# Altium PCB 330 下灯位.PcbDoc (part 4 of 5)
Units mm, origin at the board's own origin, x right, y up, seen from the top; angles counter-clockwise.
Board outline 301.8 x 92.3 mm, 2 copper layers (Top, Bottom), stack 0.323 mm thick; 298 components, 203 nets, 2190 pads, 758 vias.
Unrouted connection lines stored in the file: 36.
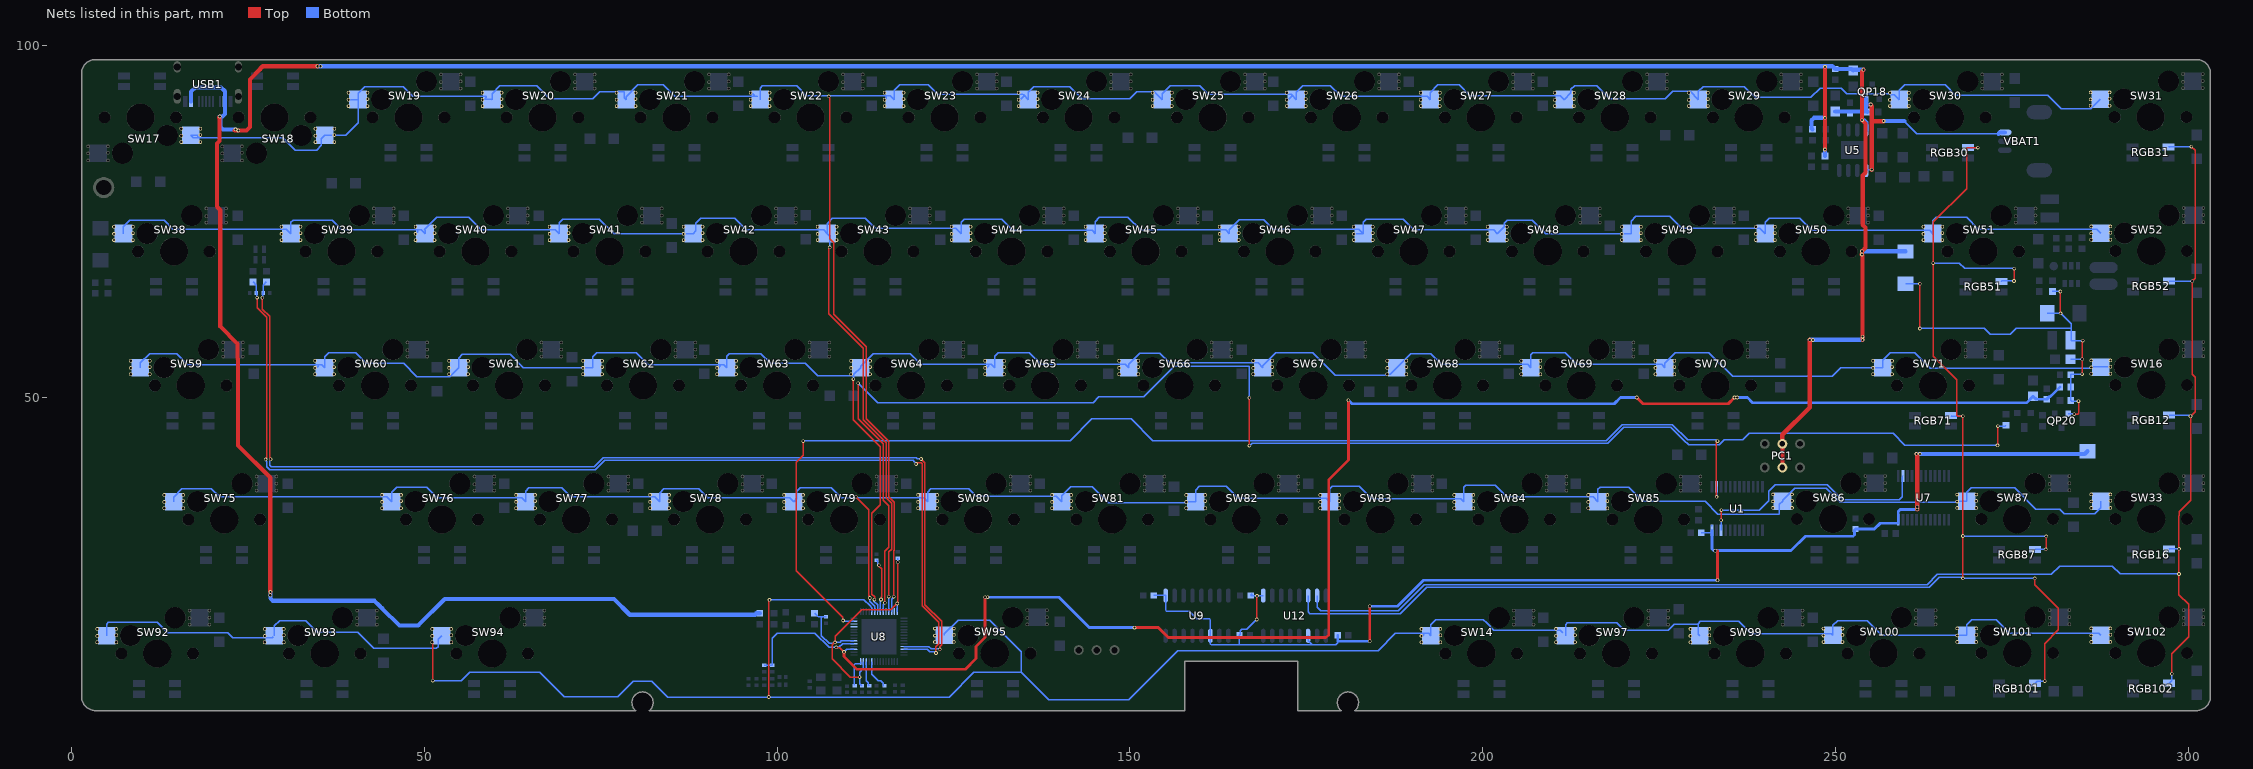
[diagram p4: the nets of this part, all layers, seen from the top]

## Via types
v1: diameter 0.508, hole 0.305, Top to Bottom, tented both sides, 758 vias

## Nets (pads, with @x,y where several pads share a name; then routed paths per layer and width w, separated by ;. In a path a pad name is that pad's centre, name@x,y a point inside that pad or via, vN(x,y) a via of type N, cw(c..) or ccw(c..) an arc to the next point about the centre after c; other vN are vias at no path point) (continued)
LED13: RGB30.4 RGB51.4 RGB71.4 RGB87.4 RGB101.4 U12.6 | length 226.6
  Top w0.2: v1(268.091,24.395) 268.091,30.394 v1@268.091,47.371 ; v1(268.097,47.371) 267.362,47.371 267.245,47.488 267.245,52.541 263.906,55.88 263.906,69.092 263.906,74.93 268.605,79.629 268.605,85.354 268.722,85.471 270.201,85.471 v1(270.207,85.464) ; v1(275.336,66.548) 275.376,66.588 v1(275.376,68.297) ; v1(278.279,24.395) 278.279,23.473 281.619,20.133 281.619,17.078 279.699,15.158 v1(279.699,9.821) ; v1(279.825,28.491) 279.884,28.55 279.884,28.739 279.908,28.763 v1(279.908,30.353)
  Bottom w0.2: U12.6@175.26,21.956 175.26,19.656 175.504,19.412 188.354,19.412 192.065,23.123 263.333,23.123 264.76,24.549 268.091,24.549 v1@268.12,24.52 ; v1(263.887,69.092) 267.601,69.092 268.367,68.326 275.347,68.326 v1(275.376,68.297) ; RGB71.4@266.412,47.464 266.505,47.371 v1(268.097,47.371) ; v1(268.08,30.394) 279.867,30.394 v1(279.908,30.353) ; v1(268.091,24.395) 268.12,24.424 v1@268.12,24.52 ; RGB30.4@268.782,85.464 v1(270.207,85.464) ; RGB51.4@273.532,66.464 273.616,66.548 v1(275.336,66.548) ; v1(278.279,24.395) 268.233,24.395 268.12,24.508 v1@268.12,24.52 ; RGB101.4@278.325,9.525 278.621,9.821 v1(279.699,9.821) ; RGB87.4@278.325,28.509 278.342,28.491 v1(279.825,28.491)
LED14: RGB12.4 RGB16.4 RGB31.4 RGB52.4 RGB102.4 U12.7 | length 217.5
  Top w0.2: v1(297.71,10.865) 297.71,13.738 300.101,16.129 300.101,20.701 298.716,22.086 298.716,33.271 298.75,33.305 298.75,33.863 300.355,35.468 v1(300.355,47.371) 301.015,48.031 301.015,51.317 301.016,51.318 301.016,52.271 301.015,52.273 301.015,52.915 300.609,53.321 v1(300.609,66.506) 301.016,66.913 301.016,85.064 v1(300.482,85.598)
  Bottom w0.2: U12.7@176.53,21.956 176.53,20.32 177.038,19.812 188.033,19.812 191.744,23.523 263.017,23.523 264.443,24.949 280.6,24.949 281.787,26.136 289.251,26.136 290.369,25.018 v1(298.721,25.018) ; RGB31.4@297.242,85.514 297.326,85.598 v1(300.482,85.598) ; RGB102.4@297.336,9.525 297.71,9.899 v1(297.71,10.865) ; RGB16.4@297.336,28.525 297.388,28.577 v1(298.737,28.577) ; RGB12.4@297.336,47.525 300.118,47.525 300.272,47.371 v1(300.355,47.371) ; RGB52.4@297.336,66.525 300.59,66.525 v1(300.609,66.506)
LED_PWR: R33.1 U8.51 | length 218
  Top w0.2: v1(111.47,52.055) 111.47,47.038 112.068,46.441 112.068,46.428 115.037,43.459 115.037,35.458 115.824,34.671 115.824,28.804 115.273,28.253 v1(115.273,20.947) ; v1(166.947,43.216) v1(166.947,49.997) ; v1(272.995,43.245) 273.022,43.273 273.022,45.946 v1(273.05,45.974)
  Bottom w0.2: v1(111.47,52.055) 114.25,49.276 144.774,49.276 145.62,50.122 151.969,50.122 156.31,54.463 164.96,54.463 164.98,54.483 166.82,54.483 166.937,54.366 166.937,50.007 v1(166.947,49.997) ; U8.51@115.027,19.679 115.027,20.666 115.273,20.912 v1(115.273,20.947) ; v1(166.947,43.216) 167.006,43.216 167.315,43.525 217.769,43.525 220.045,45.801 226.701,45.801 228.503,44 228.521,44 229.217,43.304 233.528,43.304 234.236,44.012 236.91,44.012 237.837,44.938 258.185,44.938 259.833,43.291 272.95,43.291 v1(272.995,43.245) ; v1(273.05,45.974) 274.074,45.974 R33.1@274.193,46.093
PMCU_5V0: C4.2 C13.2 C32.1 R1.1 U8.31 U8.33 Z3.2 | length 239.8
  Top w0.2: v1(108.377,14.606) 108.436,14.547 108.897,14.547 v1(109.474,13.97)
  Top w0.4: v1(109.474,13.97) 109.474,13.335 111.312,11.497 126.669,11.497 128.194,13.022 128.194,14.72 129.471,15.997 v1(129.471,21.724) ; v1@150.653,17.433 154.017,17.433 155.448,16.002 177.8,16.002 178.181,16.383 178.181,38.354 180.979,41.152 v1(180.979,49.643) ; v1(221.86,50.027) 222.737,49.151 234.825,49.151 v1(235.712,50.038)
  Bottom w0.2: Z3.2@98.171,12.061 C13.2@99.304,12.061 99.304,15.873 100.032,16.601 105.363,16.601 107.359,14.606 v1(108.377,14.606) 108.761,14.606 109.284,15.129 U8.33@110.877,15.129 ; v1(109.474,13.97) 109.512,13.97 109.871,14.329 U8.31@110.877,14.329
  Bottom w0.4: v1(129.471,21.724) 139.947,21.724 144.251,17.42 v1(150.653,17.42) ; v1(180.979,49.643) 181.473,49.149 218.673,49.149 219.551,50.027 v1(221.86,50.027) ; v1(236.093,50.038) 237.531,50.038 238.293,49.276 277.106,49.276 C32.1@278.048,50.218 278.477,49.789 C4.2@279.98,49.789 280.33,50.139 280.45,50.139 280.857,50.546 R1.1@281.837,51.525
  other v1: 129.835,21.727
R0: U8.55
R1: SW17.2 SW17.12 SW17.13 SW17.18 SW17.19 SW17.20 SW17.21 SW18.2 SW18.12 SW18.13 SW18.18 SW18.19 SW18.20 SW18.21 SW19.2 SW19.12 SW19.13 SW19.18 SW19.19 SW19.20 SW19.21 SW20.2 SW20.12 SW20.13 SW20.18 SW20.19 SW20.20 SW20.21 SW21.2 SW21.12 SW21.13 SW21.18 SW21.19 SW21.20 SW21.21 SW22.2 SW22.12 SW22.13 SW22.18 SW22.19 SW22.20 SW22.21 SW23.2 SW23.12 SW23.13 SW23.18 SW23.19 SW23.20 SW23.21 SW24.2 SW24.12 SW24.13 SW24.18 SW24.19 SW24.20 SW24.21 SW25.2 SW25.12 SW25.13 SW25.18 SW25.19 SW25.20 SW25.21 SW26.2 SW26.12 SW26.13 SW26.18 SW26.19 SW26.20 SW26.21 SW27.2 SW27.12 SW27.13 SW27.18 SW27.19 SW27.20 SW27.21 SW28.2 SW28.12 SW28.13 SW28.18 SW28.19 SW28.20 SW28.21 SW29.2 SW29.12 SW29.13 SW29.18 SW29.19 SW29.20 SW29.21 SW30.2 SW30.12 SW30.13 SW30.18 SW30.19 SW30.20 SW30.21 SW31.2 SW31.12 SW31.13 SW31.18 SW31.19 SW31.20 SW31.21 U8.54 | length 393.2
  Top w0.2: v1(107.315,92.71) 107.315,92.627 107.444,92.498 107.444,72.545 108.016,71.973 108.016,71.075 108.002,71.062 108.002,61.827 112.622,57.208 112.622,47.019 115.837,43.803 115.837,35.998 116.624,35.211 116.624,28.371 116.535,28.282 v1(116.535,21.798)
  Bottom w0.2: SW17.2@18.032,87.194 SW17.2@16.882,87.194 17.208,86.868 SW17.2@17.866,86.868 ; SW17.20@18.232,87.234 18.032,87.234 17.866,87.068 SW17.2@17.866,86.868 ; SW19.20@39.232,92.234 39.272,92.274 SW19.2@40.582,92.274 ; SW20.20@58.232,92.234 SW20.20@58.301,92.304 ; SW20.2@58.332,92.329 SW20.2@58.432,92.329 ; SW20.2@58.432,92.234 SW20.2@58.527,92.329 ; SW22.20@96.232,92.234 SW22.2@96.432,92.234 ; SW22.21@96.232,93.234 96.432,93.234 96.757,92.91 SW22.2@96.757,92.71 ; SW22.2@97.167,92.689 97.147,92.71 SW22.2@96.757,92.71 ; SW22.2@97.582,92.274 97.582,93.899 97.917,94.234 102.743,94.234 104.158,92.819 107.315,92.819 115.465,92.819 116.037,92.819 SW23.2@116.582,92.274 116.582,93.595 117.348,94.361 121.412,94.361 122.759,93.014 134.842,93.014 SW24.2@134.927,92.929 ; SW23.20@115.232,92.234 115.465,92.468 SW23.2@115.465,92.751 ; U8.54@116.227,19.679 116.227,21.409 116.535,21.717 v1(116.535,21.798) ; SW24.20@134.232,92.234 134.432,92.234 134.927,92.729 SW24.2@134.927,92.929 ; SW26.20@172.232,92.234 172.432,92.234 172.927,92.729 SW26.2@172.927,92.929 ; 274.588,92.899 267.019,92.899 265.557,94.361 259.842,94.361 259.082,93.601 SW30.2@259.082,92.274 258.392,92.964 257.832,92.964 257.703,93.093 251.621,93.093 250.818,93.897 247.856,93.897 246.542,92.583 238.633,92.583 237.109,94.107 231.267,94.107 230.582,93.422 SW29.2@230.582,92.274 229.415,93.441 226.975,93.441 225.908,92.374 218.049,92.374 216.186,94.237 213.044,94.237 212.514,93.707 212.514,93.207 SW28.2@211.582,92.274 211.019,92.837 198.181,92.837 196.657,94.361 193.675,94.361 192.582,93.268 SW27.2@192.582,92.274 192.146,92.71 179.959,92.71 178.435,94.234 174.498,94.234 173.582,93.318 SW26.2@173.582,92.274 SW26.2@172.927,92.929 ; 274.589,92.9 276.337,92.9 ; 276.338,92.899 280.1,92.899 282.011,90.988 286.206,90.988 SW31.2@287.542,92.324 ; SW17.2@17.866,86.868 29.909,86.868 31.675,85.101 34.708,85.101 35.368,85.761 35.368,86.68 SW18.2@35.882,87.194 37.132,87.194 37.172,87.234 SW18.20@37.232,87.234 38.847,87.234 40.582,88.969 SW19.2@40.582,92.274 ; SW19.2@40.582,92.274 40.582,93.16 41.529,94.107 46.99,94.107 48.33,92.767 58.765,92.767 58.765,92.567 SW20.2@58.527,92.329 ; SW20.2@58.527,92.329 59.527,92.329 SW20.2@59.582,92.274 59.582,93.11 60.706,94.234 65.913,94.234 67.778,92.369 73.827,92.369 74.847,93.389 77.232,93.389 78.299,93.389 78.299,92.557 SW21.2@78.582,92.274 78.582,92.679 80.264,94.361 83.82,94.361 85.471,92.71 SW22.2@96.757,92.71 ; SW24.2@134.927,92.929 SW24.2@135.582,92.274 135.582,93.291 136.398,94.107 141.478,94.107 143.216,92.369 149.973,92.369 150.978,93.374 153.232,93.374 153.482,93.374 SW25.2@154.582,92.274 154.582,93.114 155.702,94.234 159.893,94.234 161.113,93.014 172.842,93.014 SW26.2@172.927,92.929
R2: SW38.2 SW38.12 SW38.13 SW38.18 SW38.19 SW38.20 SW38.21 SW39.2 SW39.12 SW39.13 SW39.18 SW39.19 SW39.20 SW39.21 SW40.2 SW40.12 SW40.13 SW40.18 SW40.19 SW40.20 SW40.21 SW41.2 SW41.12 SW41.13 SW41.18 SW41.19 SW41.20 SW41.21 SW42.2 SW42.12 SW42.13 SW42.18 SW42.19 SW42.20 SW42.21 SW43.2 SW43.12 SW43.13 SW43.18 SW43.19 SW43.20 SW43.21 SW44.2 SW44.12 SW44.13 SW44.18 SW44.19 SW44.20 SW44.21 SW45.2 SW45.12 SW45.13 SW45.18 SW45.19 SW45.20 SW45.21 SW46.2 SW46.12 SW46.13 SW46.18 SW46.19 SW46.20 SW46.21 SW47.2 SW47.12 SW47.13 SW47.18 SW47.19 SW47.20 SW47.21 SW48.2 SW48.12 SW48.13 SW48.18 SW48.19 SW48.20 SW48.21 SW49.2 SW49.12 SW49.13 SW49.18 SW49.19 SW49.20 SW49.21 SW50.2 SW50.12 SW50.13 SW50.18 SW50.19 SW50.20 SW50.21 SW51.2 SW51.12 SW51.13 SW51.18 SW51.19 SW51.20 SW51.21 SW52.2 SW52.12 SW52.13 SW52.18 SW52.19 SW52.20 SW52.21 U8.53 | length 375.3
  Top w0.2: v1(107.462,71.305) 107.454,71.305 107.337,71.188 107.337,61.927 112.222,57.042 112.222,46.853 115.437,43.637 115.437,35.832 116.224,35.045 116.224,28.536 115.827,28.139 v1(115.827,21.798)
  Bottom w0.2: SW38.2@7.332,73.274 7.332,74.261 8.255,75.184 13.081,75.184 14.351,73.914 30.442,73.914 SW39.2@31.082,73.274 31.082,74.897 31.369,75.184 36.957,75.184 38.303,73.838 49.048,73.838 49.519,73.838 SW40.2@50.082,73.274 50.082,73.76 50.002,73.84 51.726,75.565 56.261,75.565 58.039,73.787 68.569,73.787 SW41.2@69.082,73.274 69.082,74.797 69.596,75.311 74.803,75.311 76.88,73.234 SW42.20@86.732,73.234 86.792,73.234 86.832,73.274 SW42.2@88.082,73.274 88.457,73.649 88.457,74.707 89.187,75.438 93.98,75.438 95.631,73.787 106.569,73.787 SW43.2@107.082,73.274 ; SW40.20@48.802,73.304 49.048,73.551 SW40.2@49.048,73.833 ; v1(107.462,71.305) 107.462,72.895 SW43.2@107.082,73.274 ; U8.53@115.827,19.679 v1(115.827,21.798) ; SW47.20@181.732,73.234 182.063,73.234 183.042,73.234 SW47.2@183.082,73.274 ; SW52.2@287.636,73.335 287.077,73.894 270.276,73.894 268.605,75.565 264.287,75.565 263.832,75.11 SW51.2@263.832,73.274 263.398,73.708 246.713,73.708 244.99,75.431 240.658,75.431 240.082,74.855 SW50.2@240.082,73.274 239.315,74.041 238.832,74.041 238.805,74.014 229.882,74.014 229.855,74.041 228.219,74.041 226.568,75.692 221.742,75.692 221.082,75.032 SW49.2@221.082,73.274 219.832,73.274 219.792,73.234 SW49.20@219.732,73.234 208.96,73.234 207.066,75.128 203.5,75.128 203.079,74.707 203.079,74.272 SW48.2@202.082,73.274 201.557,73.799 190.234,73.799 188.722,75.311 183.515,75.311 183.082,74.878 SW47.2@183.082,73.274 ; SW43.2@107.082,73.274 107.082,74.697 107.823,75.438 112.522,75.438 113.919,74.041 115.705,74.041 115.732,74.014 124.805,74.014 124.832,74.041 125.315,74.041 SW44.2@126.082,73.274 126.082,74.901 126.492,75.311 131.826,75.311 133.424,73.713 144.644,73.713 SW45.2@145.082,73.274 145.082,74.978 145.669,75.565 149.733,75.565 151.511,73.787 163.569,73.787 SW46.2@164.082,73.274 164.082,73.838 165.481,75.237 168.984,75.237 170.31,73.911 182.445,73.911 SW47.2@183.082,73.274
R3: SW16.2 SW16.12 SW16.13 SW16.18 SW16.19 SW16.20 SW16.21 SW59.2 SW59.12 SW59.13 SW59.18 SW59.19 SW59.20 SW59.21 SW60.2 SW60.12 SW60.13 SW60.18 SW60.19 SW60.20 SW60.21 SW61.2 SW61.12 SW61.13 SW61.18 SW61.19 SW61.20 SW61.21 SW62.2 SW62.12 SW62.13 SW62.18 SW62.19 SW62.20 SW62.21 SW63.2 SW63.12 SW63.13 SW63.18 SW63.19 SW63.20 SW63.21 SW64.2 SW64.12 SW64.13 SW64.18 SW64.19 SW64.20 SW64.21 SW65.2 SW65.12 SW65.13 SW65.18 SW65.19 SW65.20 SW65.21 SW66.2 SW66.12 SW66.13 SW66.18 SW66.19 SW66.20 SW66.21 SW67.2 SW67.12 SW67.13 SW67.18 SW67.19 SW67.20 SW67.21 SW68.2 SW68.12 SW68.13 SW68.18 SW68.19 SW68.20 SW68.21 SW69.2 SW69.12 SW69.13 SW69.18 SW69.19 SW69.20 SW69.21 SW70.2 SW70.12 SW70.13 SW70.18 SW70.19 SW70.20 SW70.21 SW71.2 SW71.12 SW71.13 SW71.18 SW71.19 SW71.20 SW71.21 U8.49 | length 351.4
  Top w0.2: v1(110.799,52.635) 110.799,46.866 114.637,43.028 114.637,34.85 113.417,33.63 113.417,22.162 113.819,21.76 113.819,21.41 v1(113.784,21.374)
  Bottom w0.2: SW59.2@9.712,54.274 9.712,54.924 11.049,56.261 14.859,56.261 16.429,54.691 SW60.2@34.944,54.691 ; SW60.20@34.487,54.234 34.687,54.234 34.944,54.491 SW60.2@34.944,54.691 ; SW63.20@91.487,54.234 91.687,54.234 91.958,54.505 SW63.2@91.958,54.705 ; v1(110.799,52.635) 110.799,52.718 110.87,52.789 SW64.2@110.87,53.307 ; v1(113.784,21.374) 113.725,21.315 113.725,21.15 113.712,21.137 114.227,20.623 U8.49@114.227,19.679 ; SW65.20@129.487,54.234 129.687,54.234 130.021,54.568 SW65.2@130.021,54.768 ; 271.971,54.157 286.067,54.157 286.286,54.376 286.286,54.395 287.636,54.395 SW16.13@288.986,54.395 ; 271.971,54.158 263.461,54.158 261.277,56.342 257.764,56.342 256.712,55.29 SW71.2@256.712,54.274 255.462,54.274 255.422,54.234 SW71.20@255.362,54.234 250.78,54.234 249.558,53.012 235.461,53.012 232.085,56.388 227.33,56.388 225.837,54.895 SW70.2@225.837,54.274 225.374,54.737 213.36,54.737 211.749,56.348 207.097,56.348 206.837,56.088 SW69.2@206.837,54.274 206.374,54.737 194.198,54.737 192.674,56.261 189.824,56.261 SW68.2@187.837,54.274 186.897,53.334 186.587,53.334 186.487,53.234 186.444,53.277 186.348,53.277 186.234,53.163 179.122,53.163 175.897,56.388 170.688,56.388 168.837,54.537 SW67.2@168.837,54.274 168.168,54.943 155.623,54.943 154.248,56.318 151.384,56.318 149.837,54.771 SW66.2@149.837,54.274 149.374,54.737 137.414,54.737 135.763,56.388 131.318,56.388 130.837,55.907 SW65.2@130.837,54.274 130.343,54.768 SW65.2@130.021,54.768 ; SW60.2@34.944,54.691 35.42,54.691 SW60.2@35.837,54.274 35.837,55.776 36.449,56.388 40.259,56.388 41.783,54.864 47.068,54.864 48.927,53.005 53.567,53.005 SW61.2@54.837,54.274 54.837,55.599 55.372,56.134 62.13,56.134 64.022,54.243 72.487,54.243 73.805,54.243 SW62.2@73.837,54.274 73.837,55.803 74.422,56.388 80.01,56.388 81.693,54.705 SW63.2@91.958,54.705 ; SW63.2@91.958,54.705 92.406,54.705 SW63.2@92.837,54.274 92.837,55.88 93.218,56.261 97.663,56.261 99.06,54.864 103.987,54.864 105.743,53.107 110.67,53.107 SW64.2@110.87,53.307 ; SW64.2@110.87,53.307 SW64.2@111.837,54.274 111.837,54.433 113.631,56.227 118.865,56.227 120.324,54.768 SW65.2@130.021,54.768
R4: SW33.2 SW33.12 SW33.13 SW33.18 SW33.19 SW33.20 SW33.21 SW75.2 SW75.12 SW75.13 SW75.18 SW75.19 SW75.20 SW75.21 SW76.2 SW76.12 SW76.13 SW76.18 SW76.19 SW76.20 SW76.21 SW77.2 SW77.12 SW77.13 SW77.18 SW77.19 SW77.20 SW77.21 SW78.2 SW78.12 SW78.13 SW78.18 SW78.19 SW78.20 SW78.21 SW79.2 SW79.12 SW79.13 SW79.18 SW79.19 SW79.20 SW79.21 SW80.2 SW80.12 SW80.13 SW80.18 SW80.19 SW80.20 SW80.21 SW81.2 SW81.12 SW81.13 SW81.18 SW81.19 SW81.20 SW81.21 SW82.2 SW82.12 SW82.13 SW82.18 SW82.19 SW82.20 SW82.21 SW83.2 SW83.12 SW83.13 SW83.18 SW83.19 SW83.20 SW83.21 SW84.2 SW84.12 SW84.13 SW84.18 SW84.19 SW84.20 SW84.21 SW85.2 SW85.12 SW85.13 SW85.18 SW85.19 SW85.20 SW85.21 SW86.2 SW86.12 SW86.13 SW86.18 SW86.19 SW86.20 SW86.21 SW87.2 SW87.12 SW87.13 SW87.18 SW87.19 SW87.20 SW87.21 U8.48 | length 326.5
  Top w0.2: v1(111.155,35.971) 113.017,34.11 113.017,21.997 113.057,21.956 113.057,21.67 v1(113.116,21.611)
  Bottom w0.2: SW75.2@14.462,35.274 14.462,35.925 15.621,37.084 19.812,37.084 20.955,35.941 44.67,35.941 SW76.2@45.337,35.274 45.337,36.574 46.087,37.324 50.306,37.324 51.817,35.813 63.798,35.813 SW77.2@64.337,35.274 64.337,36.778 64.77,37.211 69.469,37.211 70.739,35.941 82.67,35.941 SW78.2@83.337,35.274 83.337,36.474 83.947,37.084 88.9,37.084 90.17,35.814 101.797,35.814 SW79.2@102.337,35.274 102.743,35.68 102.743,36.713 103.279,37.249 107.658,37.249 109.093,35.814 110.998,35.814 v1(111.155,35.971) ; v1@111.072,35.814 120.797,35.814 SW80.2@121.337,35.274 121.337,36.628 121.793,37.084 127.127,37.084 128.197,36.014 139.597,36.014 SW81.2@140.337,35.274 140.337,36.125 141.605,37.393 144.668,37.393 146.946,35.114 157.867,35.114 SW82.20@157.987,35.234 159.297,35.234 SW82.2@159.337,35.274 159.337,36.909 159.861,37.433 163.675,37.433 165.347,35.761 177.85,35.761 SW83.2@178.337,35.274 178.337,37.113 178.689,37.465 182.499,37.465 184.277,35.687 196.924,35.687 SW84.2@197.337,35.274 197.337,37.317 197.612,37.592 201.803,37.592 203.454,35.941 215.67,35.941 SW85.2@216.337,35.274 216.337,37.013 216.662,37.338 220.726,37.338 222.769,35.295 231.53,35.295 233.355,33.47 241.958,33.47 242.075,33.587 242.075,34.889 SW86.2@242.521,35.335 242.521,35.435 244.221,37.135 248.742,37.135 250.717,35.16 267.075,35.16 267.221,35.306 268.612,35.306 SW87.2@268.625,35.319 268.625,36.596 269.24,37.211 275.421,37.211 278.439,34.193 281.813,34.193 282.478,33.528 286.766,33.528 287.636,34.398 SW33.2@287.636,35.335 ; v1(113.116,21.611) 113.116,21.168 113.827,20.457 U8.48@113.827,19.679
R5: SW14.2 SW14.12 SW14.13 SW14.18 SW14.19 SW14.20 SW14.21 SW92.2 SW92.12 SW92.13 SW92.18 SW92.19 SW92.20 SW92.21 SW93.2 SW93.12 SW93.13 SW93.18 SW93.19 SW93.20 SW93.21 SW94.2 SW94.12 SW94.13 SW94.18 SW94.19 SW94.20 SW94.21 SW95.2 SW95.12 SW95.13 SW95.18 SW95.19 SW95.20 SW95.21 SW97.2 SW97.12 SW97.13 SW97.18 SW97.19 SW97.20 SW97.21 SW99.2 SW99.12 SW99.13 SW99.18 SW99.19 SW99.20 SW99.21 SW100.2 SW100.12 SW100.13 SW100.18 SW100.19 SW100.20 SW100.21 SW101.2 SW101.12 SW101.13 SW101.18 SW101.19 SW101.20 SW101.21 SW102.2 SW102.12 SW102.13 SW102.18 SW102.19 SW102.20 SW102.21 U8.47 | length 366.9
  Top w0.2: SW94.19@51.102,15.334 51.16,15.277 51.16,15.089 51.181,15.067 v1(51.181,9.906) ; v1(98.807,7.578) 98.807,21.237 v1(98.917,21.347)
  Bottom w0.2: SW92.2@4.962,16.274 4.953,16.283 4.953,17.917 5.197,18.161 12.14,18.161 13.59,16.711 22.096,16.711 22.819,15.988 28.421,15.988 SW93.2@28.562,16.129 ; SW93.2@28.707,16.274 28.707,17.658 29.464,18.415 33.147,18.415 34.798,16.764 40.513,16.764 42.799,14.478 51.689,14.478 51.943,14.732 51.943,15.765 SW94.2@52.452,16.274 ; v1(51.181,9.906) 55.245,9.906 56.407,11.068 66.354,11.068 69.787,7.635 77.436,7.635 79.604,9.804 82.202,9.804 84.472,7.533 98.807,7.533 124.36,7.533 127.878,11.051 134.631,11.051 ; v1(98.917,21.347) 98.935,21.365 112.292,21.365 113.178,20.479 113.193,20.479 113.427,20.245 U8.47@113.427,19.679 ; SW95.2@123.707,16.316 123.707,16.519 125.647,18.459 130.131,18.459 134.631,13.959 134.631,11.051 ; SW14.20@191.32,16.234 191.52,16.234 191.686,16.401 SW14.2@191.686,16.601 ; SW97.2@211.36,16.683 211.025,17.018 210.507,17.018 210.503,17.014 201.614,17.014 200.56,18.069 200.118,18.51 193.356,18.51 192.67,17.824 SW14.2@192.67,16.274 192.343,16.601 SW14.2@191.686,16.601 ; SW97.2@211.757,16.274 211.757,17.828 212.003,18.074 219.042,18.074 220.102,17.014 226.297,17.014 226.945,17.662 227.19,17.907 230.586,17.907 ; SW99.2@230.807,16.274 230.586,16.496 230.586,17.907 ; SW102.2@287.636,16.335 287.334,16.637 274.736,16.637 272.831,18.542 269.367,18.542 268.636,17.811 SW101.2@268.636,16.335 268.596,16.295 267.336,16.295 267.286,16.344 256.579,16.344 254.508,18.415 250.317,18.415 249.673,17.771 SW100.2@249.673,16.308 249.415,16.567 238.068,16.567 236.345,18.29 230.89,18.29 230.586,17.986 230.586,17.907 ; 134.631,11.051 136.214,9.468 138.495,7.187 149.808,7.187 156.777,14.156 185.177,14.156 187.622,16.601 190.449,16.601 SW14.2@191.686,16.601
RSTN: C40.2 U8.24 | length 4.4
  Bottom w0.2: U8.24@113.427,12.579 113.427,10.779 114.335,9.871 114.678,9.871 115.011,9.538 115.011,9.123 C40.2@115.039,9.096
S: 
SDO: U1.22 U7.2 | length 34.8
  Top w0.2: v1(233.807,32.639) 233.833,32.665 233.833,34.051 v1(233.859,34.077)
  Bottom w0.2: v1(233.807,32.639) 233.818,32.628 U1.22@233.818,31.19 ; v1(233.859,34.077) 239.22,34.077 240.562,35.419 240.562,36.727 241.478,37.643 248.869,37.643 250.952,35.56 259.094,35.56 259.484,35.95 259.484,38.814 U7.2@259.584,38.914
SIN: U1.2 U8.41 | length 173.7
  Top w0.2: v1(103.702,43.851) 103.696,43.845 103.696,41.826 102.737,40.867 102.737,25.46 109.288,18.909 109.288,18.474 v1(109.347,18.415) ; v1@233.153,35.959 233.153,43.629 233.299,43.774 v1(233.299,43.858)
  Bottom w0.2: v1(103.702,43.851) 103.784,43.933 114.922,43.933 114.951,43.904 141.539,43.904 144.62,46.986 150.182,46.986 153.275,43.892 167.117,43.892 167.149,43.925 217.542,43.925 219.818,46.201 226.886,46.201 229.075,44.012 233.062,44.012 233.216,43.858 v1(233.299,43.858) ; v1(109.347,18.415) 109.433,18.329 U8.41@110.877,18.329 ; v1(233.168,35.945) U1.2@233.168,37.39
USB_5V0: C3.1 C44.1 DV2.1 PC1.2 PC1.5 R9.1 R31.1 R87.2 U5.4 USB1.A4 USB1.B4 | length 488.9
  Top w0.6: v1@20.875,89.709 20.943,89.642 20.943,86.408 20.582,86.047 20.582,77.067 21.064,76.585 21.064,60.089 23.512,57.641 23.512,55.524 23.563,55.472 23.563,43.239 28.154,38.648 v1@28.154,22.483 ; v1@23.114,87.884 v1(23.622,87.884) 24.765,87.884 25.273,88.392 25.273,95.123 26.713,96.563 26.713,96.636 27.07,96.993 v1(34.833,96.993) ; PC1.5@242.486,43.418 242.486,44.747 246.371,48.632 v1(246.371,58.205) ; PC1.2@242.501,40.113 PC1.5@242.501,43.463 ; v1(248.529,85.188) 248.529,89.673 v1(248.531,89.676) 248.531,91.432 248.539,91.44 v1(248.539,96.901) ; v1(253.762,70.305) 253.874,70.193 v1(253.874,58.205) ; v1@253.774,70.305 v1(253.774,70.755) 254.287,71.268 254.287,74.119 253.882,74.524 253.882,81.494 254.287,81.899 254.287,88.869 v1(253.793,89.363) 253.793,96.289 v1(253.991,96.487)
  Bottom w0.6: USB1.A4@16.921,92.007 16.921,93.386 17.53,93.996 21.167,93.996 21.721,93.442 21.721,90.215 21.369,89.863 v1(20.972,89.863) 21.097,89.738 21.097,88.39 21.449,88.038 v1(23.211,88.038) ; v1(28.157,22.483) 28.157,21.56 28.509,21.209 42.93,21.209 43.555,20.584 43.568,20.584 44.007,20.145 44.007,20.132 46.444,17.695 49.106,17.695 52.874,21.463 76.87,21.463 79.094,19.238 96.845,19.238 97.046,19.439 R87.2@97.536,19.439 ; v1(34.833,96.993) 249.583,96.993 C44.1@249.986,96.59 252.345,96.59 C3.1@252.549,96.386 252.649,96.487 v1(253.991,96.487) ; v1(246.371,58.205) v1(253.874,58.205) ; R9.1@246.75,88.047 246.634,88.163 246.634,89.324 246.985,89.676 v1(248.531,89.676) ; v1(248.529,85.188) 248.529,84.271 R31.1@248.532,84.267 ; v1(253.774,70.755) 259.953,70.755 DV2.1@259.969,70.739 ; v1(253.793,89.363) 254.025,89.363 254.379,89.009 254.379,87.962 U5.4@254.381,87.96
  other v1: 28.146,22.007 246.824,58.18 253.873,58.674 35.274,96.985
USB_DN: R100.2 U8.12 Z2.2 | length 153.9
  Top w0.2: v1(26.283,64.184) 26.283,62.744 27.635,61.392 27.635,41.501 27.477,41.343 v1(27.477,41.259) ; v1(119.702,40.609) 119.785,40.609 119.933,40.757 120.427,40.757 120.544,40.64 120.544,20.514 122.907,18.151 122.907,15.66 122.907,15.148 122.486,14.727 122.486,13.838 v1(122.513,13.811)
  Bottom w0.2: R100.2@25.7,66.409 26.15,65.959 Z2.2@26.15,64.852 26.224,64.778 26.224,64.243 v1(26.283,64.184) ; v1(27.477,41.259) 27.477,41.118 27.636,40.959 27.636,40.239 28.087,39.788 74.205,39.788 75.527,41.11 119.397,41.11 119.397,40.997 119.702,40.692 v1(119.702,40.609) ; U8.12@117.977,14.329 121.307,14.329 121.646,13.99 122.251,13.99 122.43,13.811 v1(122.513,13.811)
USB_DP: R101.2 U8.11 Z1.2 | length 153.1
  Top w0.2: v1(27.027,64.181) 27.027,62.565 28.035,61.557 28.035,41.517 28.194,41.358 v1(28.194,41.275) ; v1(120.404,41.311) 120.438,41.311 120.944,40.806 120.944,20.68 123.307,18.317 123.307,15.494 123.307,14.983 123.037,14.712 123.037,14.329 v1(123.04,14.326)
  Bottom w0.2: v1(27.027,64.181) 27.083,64.236 27.083,64.797 Z1.2@27.138,64.852 27.138,65.927 27.198,65.987 27.198,66.044 27.563,66.409 R101.2@27.588,66.409 ; 28.036,41.033 28.036,40.405 28.252,40.188 74.04,40.188 75.361,41.51 119.722,41.51 119.862,41.37 120.345,41.37 v1(120.404,41.311) ; U8.11@117.977,14.729 121.473,14.729 121.812,14.39 122.492,14.39 122.498,14.385 122.981,14.385 v1(123.04,14.326)
VBAT: C6.1 C41.1 QP18.2 R4.2 U5.5 VBAT1.1 | length 37
  Top w0.6: v1(255.016,91.567) 255.016,91.484 255.171,91.328 255.171,89.112 ; v1(255.171,82.329) 255.171,89.164 255.208,89.201 256.828,89.201 v1(256.851,89.225)
  Bottom w0.2: U5.5@254.381,82.22 254.491,82.329 v1(255.171,82.329) ; 259.771,89.225 261.562,87.434 VBAT1.1@273.146,87.434
  Bottom w0.6: C41.1@249.989,90.589 252.081,90.589 R4.2@254.474,90.589 ; QP18.2@254.307,92.343 254.307,91.567 ; R4.2@254.532,90.53 R4.2@254.474,90.589 ; v1(255.016,91.567) 254.307,91.567 ; v1(256.851,89.225) 259.771,89.225 ; VBAT1.1@273.146,87.434 273.321,87.609 VBAT1.1@274.033,87.609 ; 254.307,91.567 254.307,90.755 R4.2@254.474,90.589
VBUS: 
VDD: C5.2 C11.2 C14.1 C16.2 C17.1 C35.2 DV3.2 U1.24 U7.24 U9.1 U9.11 U12.1 U12.11 | length 179.6
  Top w0.2: v1(167.987,18.564) 168.005,18.582 168.005,21.897 v1(168.023,21.915)
  Top w0.4: v1(183.999,15.47) v1(183.999,20.443) ; v1(233.299,24.13) 233.299,28.301
  Top w0.6: v1(261.493,42.037) 261.62,41.91 v1(261.62,34.544) v1(261.62,34.163)
  Bottom w0.2: C14.1@153.404,21.971 155.052,21.971 U9.1@155.067,21.956 155.067,19.855 155.184,19.738 158.399,19.738 159.482,18.656 161.3,18.656 161.417,18.538 U9.11@161.417,16.256 161.417,15.073 161.534,14.956 165.53,14.956 ; C16.2@167.327,22.178 C16.2@167.12,21.971 167.176,21.915 v1(168.023,21.915) 168.869,21.915 U12.1@168.91,21.956 ; v1(167.987,18.564) 166.568,17.145 165.859,17.145 165.667,16.953 165.667,16.457 C17.1@165.53,16.32 165.53,14.956 ; U12.11@175.26,16.256 175.26,15.573 175.877,14.956 ; 179.463,15.47 179.463,15.252 179.167,14.956 175.877,14.956 ; C35.2@230.989,30.861 U1.24@232.418,30.861 ; U1.24@232.518,31.75 U1.24@232.518,31.952 ; 165.53,14.956 175.877,14.956
  Bottom w0.4: C11.2@179.463,16.32 179.463,15.47 v1(183.999,15.47) ; v1(183.999,20.443) 187.957,20.443 191.644,24.13 v1(233.299,24.13) ; U1.24@232.518,31.19 232.518,30.861 232.518,28.555 232.752,28.321 232.973,28.321 243.713,28.321 245.745,30.353 252.496,30.353 252.73,30.587 252.73,31.254 C5.2@252.857,31.381 252.862,31.376 255.531,31.376 256.372,32.217 258.934,32.217 258.934,33.89 259.207,34.163 v1(261.62,34.163)
  Bottom w0.6: v1(261.493,42.037) v1(262.001,42.037) 285.369,42.037 DV3.2@285.75,42.418
  other v1: 232.973,28.318
VDD_3V3: C19.2 C38.2 C43.2 R54.2 U8.27 U8.34 U8.56 | length 40.3
  Top w0.2: v1(111.69,10.403) 110.396,10.403 107.823,12.975 107.823,15.016 108.125,15.319 v1(108.209,15.319) 108.209,16.178 111.969,19.939 116.133,19.939 v1(117.027,20.833) 117.086,20.892 117.086,21.095 117.095,21.104 v1@117.095,26.648
  Bottom w0.2: R54.2@105.294,19.439 105.319,19.439 105.684,19.074 105.684,19.051 105.801,18.934 106.416,18.934 ; C38.2@106.934,18.934 106.416,18.934 ; v1(108.209,15.319) 108.125,15.319 107.983,15.176 107.354,15.176 106.281,16.25 106.281,18.798 106.416,18.934 ; v1@108.209,15.327 108.916,15.327 109.118,15.529 110.477,15.529 U8.34@110.877,15.529 ; C43.2@112.019,9.155 111.974,9.155 111.69,9.439 v1(111.69,10.403) 111.69,11.106 112.227,11.643 U8.27@112.227,12.579 ; U8.56@117.027,19.679 117.027,20.079 v1(117.027,20.833) ; v1(117.094,26.67) C19.2@117.094,27.236
VDD_5V0: C15.1 C25.2 CA3.1 DV1.2 DV2.2 QP20.2 R1.2 R14.1 R40.1 | length 59
  Top w0.2: v1(262.001,59.817) v1(262.001,66.167) ; v1(281.907,65.063) 281.921,65.049 281.921,61.977 v1(281.936,61.963) ; v1(283.877,47.674) 284.363,47.674 284.48,47.791 v1(284.48,49.53) ; v1(284.988,53.34) 285.037,53.389 285.037,58.053 v1(285.086,58.102)
  Bottom w0.2: DV2.2@259.969,66.167 v1(262.001,66.167) ; v1(262.001,59.817) 271.145,59.817 271.974,58.988 274.805,58.988 275.634,59.817 283.44,59.817 ; DV1.2@280.035,61.976 280.048,61.963 v1(281.936,61.963) 283.44,60.459 283.44,59.817 ; R40.1@280.763,65.063 v1(281.907,65.063) ; QP20.2@283.017,47.736 283.417,47.736 283.42,47.733 283.819,47.733 v1(283.877,47.674) ; C15.1@283.364,55.447 283.368,55.451 v1(285.013,55.451) ; v1(284.48,49.53) 283.494,49.53 R14.1@283.394,49.63 283.394,53.24 C25.2@283.357,53.278 283.419,53.34 v1(284.988,53.34) ; v1(285.086,58.102) 283.44,58.102 283.44,59.817
VDDLPB: C34.2 U8.28 | length 4.2
  Bottom w0.2: C34.2@110.922,9.225 110.922,12.202 111.039,12.319 111.827,12.319 U8.28@111.827,12.579
VDDLPM: C2.2 U8.26 | length 3.6
  Bottom w0.2: U8.26@112.627,12.579 112.627,9.868 112.907,9.588 112.907,9.308 C2.2@113.054,9.161
VPP: C37.2 U8.50 | length 7.7
  Top w0.2: v1(114.415,26.245) 114.415,26.123 114.801,25.737 114.801,21.793 114.73,21.723 114.73,21.408 v1(114.719,21.397)
  Bottom w0.2: C37.2@114.081,26.939 114.131,26.939 114.281,26.789 114.281,26.377 v1(114.415,26.245) v1(114.415,26.245) ; U8.50@114.627,19.679 114.627,21.305 v1(114.719,21.397)
WIN/MAC: U8.52
ZA: U8.40
ZB: U8.39
pads on no net: C18.1 SW14.3 SW14.4 SW14.5 SW14.6 SW14.7 SW14.8 SW14.9 SW16.3 SW16.4 SW16.5 SW16.6 SW16.7 SW16.8 SW16.9 SW17.3 SW17.4 SW17.5 SW17.6 SW17.7 SW17.8 SW17.9 SW18.3 SW18.4 SW18.5 SW18.6 SW18.7 SW18.8 SW18.9 SW19.3 SW19.4 SW19.5 SW19.6 SW19.7 SW19.8 SW19.9 SW20.3 SW20.4 SW20.5 SW20.6 SW20.7 SW20.8 SW20.9 SW21.3 SW21.4 SW21.5 SW21.6 SW21.7 SW21.8 SW21.9 SW22.3 SW22.4 SW22.5 SW22.6 SW22.7 SW22.8 SW22.9 SW23.3 SW23.4 SW23.5 SW23.6 SW23.7 SW23.8 SW23.9 SW24.3 SW24.4 SW24.5 SW24.6 SW24.7 SW24.8 SW24.9 SW25.3 SW25.4 SW25.5 SW25.6 SW25.7 SW25.8 SW25.9 SW26.3 SW26.4 SW26.5 SW26.6 SW26.7 SW26.8 SW26.9 SW27.3 SW27.4 SW27.5 SW27.6 SW27.7 SW27.8 SW27.9 SW28.3 SW28.4 SW28.5 SW28.6 SW28.7 SW28.8 SW28.9 SW29.3 SW29.4 SW29.5 SW29.6 SW29.7 SW29.8 SW29.9 SW30.3 SW30.4 SW30.5 SW30.6 SW30.7 SW30.8 SW30.9 SW31.3 SW31.4 SW31.5 SW31.6 SW31.7 SW31.8 SW31.9 SW33.3 SW33.4 SW33.5 SW33.6 SW33.7 SW33.8 SW33.9 SW38.3 SW38.4 SW38.5 SW38.6 SW38.7 SW38.8 SW38.9 SW39.3 SW39.4 SW39.5 SW39.6 SW39.7 SW39.8 SW39.9 SW40.3 SW40.4 SW40.5 SW40.6 SW40.7 SW40.8 SW40.9 SW41.3 SW41.4 SW41.5 SW41.6 SW41.7 SW41.8 SW41.9 SW42.3 SW42.4 SW42.5 SW42.6 SW42.7 SW42.8 SW42.9 SW43.3 SW43.4 SW43.5 SW43.6 SW43.7 SW43.8 SW43.9 SW44.3 SW44.4 SW44.5 SW44.6 SW44.7 SW44.8 SW44.9 SW45.3 SW45.4 SW45.5 SW45.6 SW45.7 SW45.8 SW45.9 SW46.3 SW46.4 SW46.5 SW46.6 SW46.7 SW46.8 SW46.9 SW47.3 SW47.4 SW47.5 SW47.6 SW47.7 SW47.8 SW47.9 SW48.3 SW48.4 SW48.5 SW48.6 SW48.7 SW48.8 SW48.9 SW49.3 SW49.4 SW49.5 SW49.6 SW49.7 SW49.8 SW49.9 SW50.3 SW50.4 SW50.5 SW50.6 SW50.7 SW50.8 SW50.9 SW51.3 SW51.4 SW51.5 SW51.6 SW51.7 SW51.8 SW51.9 SW52.3 SW52.4 SW52.5 SW52.6 SW52.7 SW52.8 SW52.9 SW59.3 SW59.4 SW59.5 SW59.6 SW59.7 SW59.8 SW59.9 SW60.3 SW60.4 SW60.5 SW60.6 SW60.7 SW60.8 SW60.9 SW61.3 SW61.4 SW61.5 SW61.6 SW61.7 SW61.8 SW61.9 SW62.3 SW62.4 SW62.5 SW62.6 SW62.7 SW62.8 SW62.9 SW63.3 SW63.4 SW63.5 SW63.6 SW63.7 SW63.8 SW63.9 SW64.3 SW64.4 SW64.5 SW64.6 SW64.7 SW64.8 SW64.9 SW65.3 SW65.4 SW65.5 SW65.6 SW65.7 SW65.8 SW65.9 SW66.3 SW66.4 SW66.5 SW66.6 SW66.7 SW66.8 SW66.9 SW67.3 SW67.4 SW67.5 SW67.6 SW67.7 SW67.8 SW67.9 SW68.3 SW68.4 SW68.5 SW68.6 SW68.7 SW68.8 SW68.9 SW69.3 SW69.4 SW69.5 SW69.6 SW69.7 SW69.8 SW69.9 SW70.3 SW70.4 SW70.5 SW70.6 SW70.7 SW70.8 SW70.9 SW71.3 SW71.4 SW71.5 SW71.6 SW71.7 SW71.8 SW71.9 SW75.3 SW75.4 SW75.5 SW75.6 SW75.7 SW75.8 SW75.9 SW76.3 SW76.4 SW76.5 SW76.6 SW76.7 SW76.8 SW76.9 SW77.3 SW77.4 SW77.5 SW77.6 SW77.7 SW77.8 SW77.9 SW78.3 SW78.4 SW78.5 SW78.6 SW78.7 SW78.8 SW78.9 SW79.3 SW79.4 SW79.5 SW79.6 SW79.7 SW79.8 SW79.9 SW80.3 SW80.4 SW80.5 SW80.6 SW80.7 SW80.8 SW80.9 SW81.3 SW81.4 SW81.5 SW81.6 SW81.7 SW81.8 SW81.9 SW82.3 SW82.4 SW82.5 SW82.6 SW82.7 SW82.8 SW82.9 SW83.3 SW83.4 SW83.5 SW83.6 SW83.7 SW83.8 SW83.9 SW84.3 SW84.4 SW84.5 SW84.6 SW84.7 SW84.8 SW84.9 SW85.3 SW85.4 SW85.5 SW85.6 SW85.7 SW85.8 SW85.9 SW86.3 SW86.4 SW86.5 SW86.6 SW86.7 SW86.8 SW86.9 SW87.3 SW87.4 SW87.5 SW87.6 SW87.7 SW87.8 SW87.9 SW92.3 SW92.4 SW92.5 SW92.6 SW92.7 SW92.8 SW92.9 SW93.3 SW93.4 SW93.5 SW93.6 SW93.7 SW93.8 SW93.9 SW94.3 SW94.4 SW94.5 SW94.6 SW94.7 SW94.8 SW94.9 SW95.3 SW95.4 SW95.5 SW95.6 SW95.7 SW95.8 SW95.9 SW97.3 SW97.4 SW97.5 SW97.6 SW97.7 SW97.8 SW97.9 SW99.3 SW99.4 SW99.5 SW99.6 SW99.7 SW99.8 SW99.9 SW100.3 SW100.4 SW100.5 SW100.6 SW100.7 SW100.8 SW100.9 SW101.3 SW101.4 SW101.5 SW101.6 SW101.7 SW101.8 SW101.9 SW102.3 SW102.4 SW102.5 SW102.6 SW102.7 SW102.8 SW102.9 U5.6 U7.5 U7.6 U7.7 U7.8 U7.9 U7.10 U7.11 U7.12 U7.13 U7.14 U7.15 U7.16 U7.17 U7.18 U7.22 U8.19 U8.46 U9.12 U12.8 U12.10 U12.12 USB1. USB1.A5 USB1.A8 USB1.B5 USB1.B8 VBAT1.0 VBAT1.0/2
copper on no net: | length 7.1
  Bottom w0.2: 89.662,11.292 90.054,11.292 90.149,11.197 92.075,9.271 93.834,9.271 94.128,9.271 94.147,9.252 ; 94.128,9.252 95.647,9.252 95.947,9.252